# Altium PCB EMG_MainBoard_Layout.PcbDoc (part 3 of 6)
Units mm, origin at the board's own origin, x right, y up, seen from the top; angles counter-clockwise.
Board outline 80 x 45 mm, 4 copper layers (L1 TOP, L2 GND, L3 POWER SIGNAL, L4 BOTTOM GND), stack 1.164 mm thick; 231 components, 136 nets, 808 pads, 288 vias.
Unrouted connection lines stored in the file: 570.
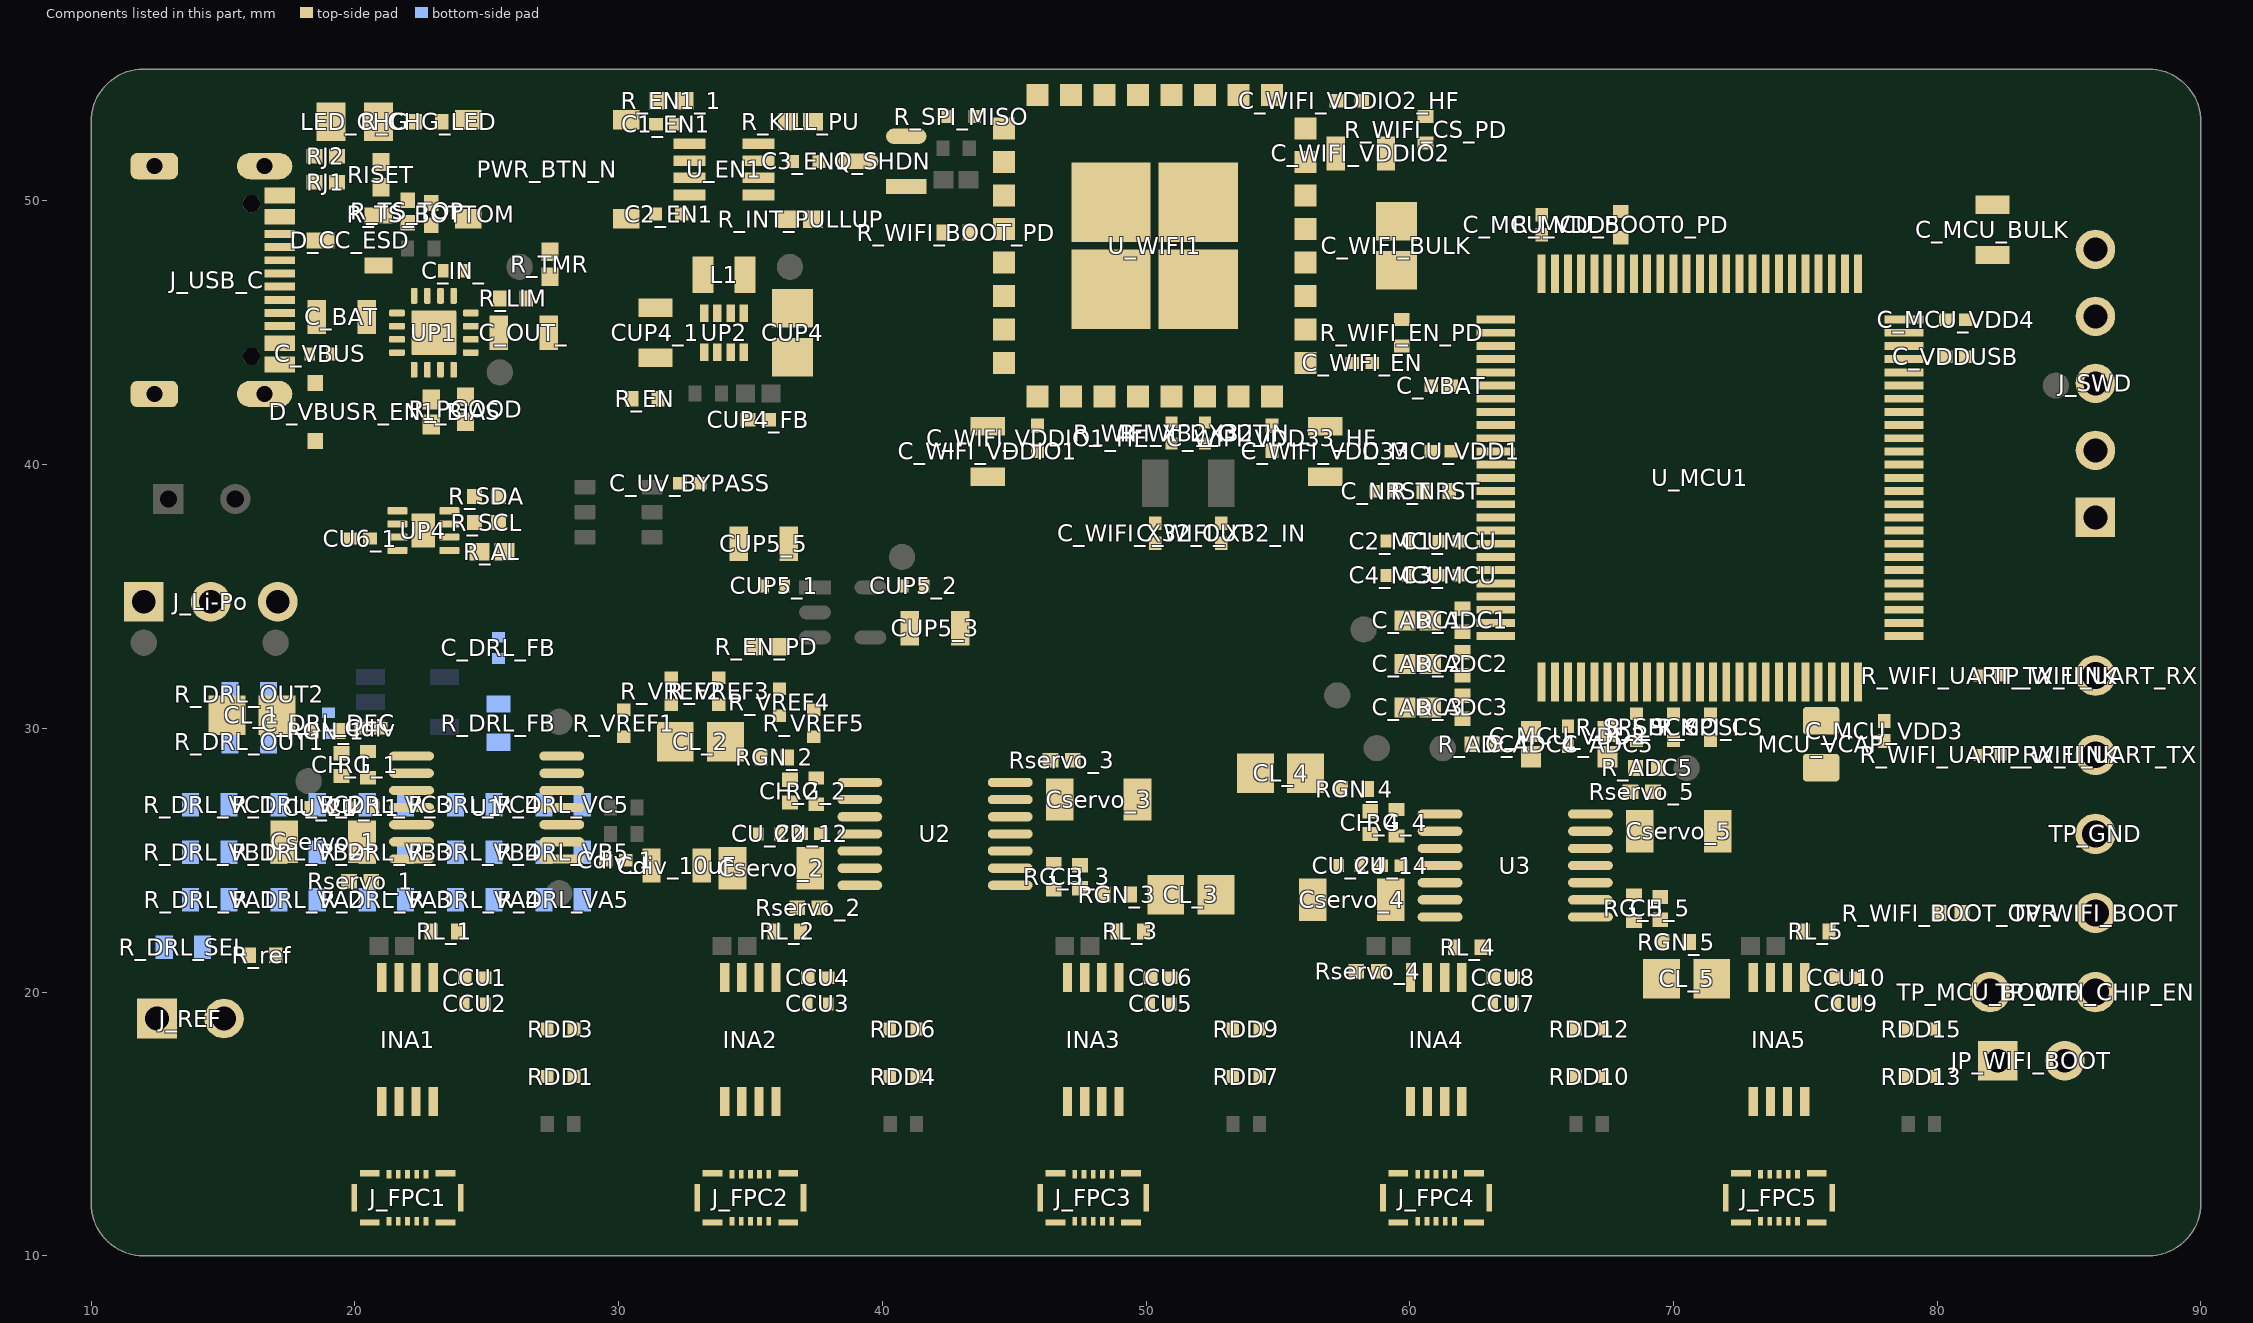
[diagram p4: the components of this part, seen from the top]

## Part data (continued)
CUP5_1: library part EMG_R5_CUP5_1, "Murata GRM155C71C105KE11D: 1 uF 16 V X7S +/-10%, 0402/1005 metric", Capacitance="1 uF", Dielectric=X7S, Manufacturer=Murata, Package="0402 / 1005 metric", Tolerance=+/-10%, Voltage Rating="16 V", Check_prices=https://www.snapeda.com/parts/GRM155C71C105KE11D/Murata/view-part/?ref=eda, Controlled Revision="R5 2026-09-16; project-local frozen symbol/footprint", Manufacturer Part Number=GRM155C71C105KE11D, MF=Murata, MP=GRM155C71C105KE11D, SnapEDA_Link=https://www.snapeda.com/parts/GRM155C71C105KE11D/Murata/view-part/?ref=snap
CUP5_2: library part EMG_R5_CUP5_2, "Murata GRM155C71C105KE11D: 1 uF 16 V X7S +/-10%, 0402/1005 metric", Capacitance="1 uF", Dielectric=X7S, Manufacturer=Murata, Package="0402 / 1005 metric", Tolerance=+/-10%, Voltage Rating="16 V", Check_prices=https://www.snapeda.com/parts/GRM155C71C105KE11D/Murata/view-part/?ref=eda, Controlled Revision="R5 2026-09-16; project-local frozen symbol/footprint", Manufacturer Part Number=GRM155C71C105KE11D, MF=Murata, MP=GRM155C71C105KE11D, SnapEDA_Link=https://www.snapeda.com/parts/GRM155C71C105KE11D/Murata/view-part/?ref=snap
CUP5_3: library part EMG_R5_CUP5_3, "10 µF ±10% 25V Ceramic Capacitor X7S 0805 (2012 Metric)", Controlled Revision="R5 2026-09-16; project-local frozen symbol/footprint"
CUP5_5: library part EMG_R5_CUP5_5, "10 µF ±10% 25V Ceramic Capacitor X7S 0805 (2012 Metric)", Controlled Revision="R5 2026-09-16; project-local frozen symbol/footprint"
D_CC_ESD: library part EMG_R5_D_CC_ESD, "TVS Diode (Uni-directional)", Manufacturer_Name=Nexperia, Controlled Revision="R5 2026-09-16; project-local frozen symbol/footprint", Datasheet Link=https://assets.nexperia.com/documents/data-sheet/PESD5V0X2UT.pdf, Height=1mm, Manufacturer_Part_Number=PESD5V0X2UTR
D_VBUS: library part EMG_R5_D_VBUS, "TVS DIODE 5V 14V SOD323", Controlled Revision="R5 2026-09-16; project-local frozen symbol/footprint"
INA1: library part EMG_R5_INA1, "Micropower, Zero Drift, True Rail-to-Rail Instrumentation Amplifier", Package="MSOP-8 Analog Devices", Availability="In Stock", Check_prices=https://www.snapeda.com/parts/AD8237ARMZ/Analog+Devices/view-part/?ref=eda, Controlled Revision="R5 2026-09-16; project-local frozen symbol/footprint", EMG Library Revision="R3 2026-09-12; EMG_AD8237_R3_MSOP8; numeric pad IDs 1-8", MF="Analog Devices", MP=AD8237ARMZ, Price=None, Purchase-URL=https://pricing.snapeda.com/search?q=AD8237ARMZ&ref=eda, SnapEDA_Link=https://www.snapeda.com/parts/AD8237ARMZ/Analog+Devices/view-part/?ref=snap
INA2: library part EMG_R5_INA2, "Micropower, Zero Drift, True Rail-to-Rail Instrumentation Amplifier", Package="MSOP-8 Analog Devices", Availability="In Stock", Check_prices=https://www.snapeda.com/parts/AD8237ARMZ/Analog+Devices/view-part/?ref=eda, Controlled Revision="R5 2026-09-16; project-local frozen symbol/footprint", EMG Library Revision="R3 2026-09-12; EMG_AD8237_R3_MSOP8; numeric pad IDs 1-8", MF="Analog Devices", MP=AD8237ARMZ, Price=None, Purchase-URL=https://pricing.snapeda.com/search?q=AD8237ARMZ&ref=eda, SnapEDA_Link=https://www.snapeda.com/parts/AD8237ARMZ/Analog+Devices/view-part/?ref=snap
INA3: library part EMG_R5_INA3, "Micropower, Zero Drift, True Rail-to-Rail Instrumentation Amplifier", Package="MSOP-8 Analog Devices", Availability="In Stock", Check_prices=https://www.snapeda.com/parts/AD8237ARMZ/Analog+Devices/view-part/?ref=eda, Controlled Revision="R5 2026-09-16; project-local frozen symbol/footprint", EMG Library Revision="R3 2026-09-12; EMG_AD8237_R3_MSOP8; numeric pad IDs 1-8", MF="Analog Devices", MP=AD8237ARMZ, Price=None, Purchase-URL=https://pricing.snapeda.com/search?q=AD8237ARMZ&ref=eda, SnapEDA_Link=https://www.snapeda.com/parts/AD8237ARMZ/Analog+Devices/view-part/?ref=snap
INA4: library part EMG_R5_INA4, "Micropower, Zero Drift, True Rail-to-Rail Instrumentation Amplifier", Package="MSOP-8 Analog Devices", Availability="In Stock", Check_prices=https://www.snapeda.com/parts/AD8237ARMZ/Analog+Devices/view-part/?ref=eda, Controlled Revision="R5 2026-09-16; project-local frozen symbol/footprint", EMG Library Revision="R3 2026-09-12; EMG_AD8237_R3_MSOP8; numeric pad IDs 1-8", MF="Analog Devices", MP=AD8237ARMZ, Price=None, Purchase-URL=https://pricing.snapeda.com/search?q=AD8237ARMZ&ref=eda, SnapEDA_Link=https://www.snapeda.com/parts/AD8237ARMZ/Analog+Devices/view-part/?ref=snap
INA5: library part EMG_R5_INA5, "Micropower, Zero Drift, True Rail-to-Rail Instrumentation Amplifier", Package="MSOP-8 Analog Devices", Availability="In Stock", Check_prices=https://www.snapeda.com/parts/AD8237ARMZ/Analog+Devices/view-part/?ref=eda, Controlled Revision="R5 2026-09-16; project-local frozen symbol/footprint", EMG Library Revision="R3 2026-09-12; EMG_AD8237_R3_MSOP8; numeric pad IDs 1-8", MF="Analog Devices", MP=AD8237ARMZ, Price=None, Purchase-URL=https://pricing.snapeda.com/search?q=AD8237ARMZ&ref=eda, SnapEDA_Link=https://www.snapeda.com/parts/AD8237ARMZ/Analog+Devices/view-part/?ref=snap
J_FPC1: library part EMG_R5_J_FPC1, "10 Position Connector Receptacle, Center Strip Contacts Surface Mount Gold", Package=None, Check_prices=https://www.snapeda.com/parts/BK13C06-10DS/2-0.35V(895)/Hirose+Electric+Co+Ltd/view-part/?ref=eda, Controlled Revision="R5 2026-09-16; project-local frozen symbol/footprint", MF="Hirose Electric Co Ltd", MP=BK13C06-10DS/2-0.35V(895), SnapEDA_Link=https://www.snapeda.com/parts/BK13C06-10DS/2-0.35V(895)/Hirose+Electric+Co+Ltd/view-part/?ref=snap
J_FPC2: library part EMG_R5_J_FPC2, "10 Position Connector Receptacle, Center Strip Contacts Surface Mount Gold", Package=None, Check_prices=https://www.snapeda.com/parts/BK13C06-10DS/2-0.35V(895)/Hirose+Electric+Co+Ltd/view-part/?ref=eda, Controlled Revision="R5 2026-09-16; project-local frozen symbol/footprint", MF="Hirose Electric Co Ltd", MP=BK13C06-10DS/2-0.35V(895), SnapEDA_Link=https://www.snapeda.com/parts/BK13C06-10DS/2-0.35V(895)/Hirose+Electric+Co+Ltd/view-part/?ref=snap
J_FPC3: library part EMG_R5_J_FPC3, "10 Position Connector Receptacle, Center Strip Contacts Surface Mount Gold", Package=None, Check_prices=https://www.snapeda.com/parts/BK13C06-10DS/2-0.35V(895)/Hirose+Electric+Co+Ltd/view-part/?ref=eda, Controlled Revision="R5 2026-09-16; project-local frozen symbol/footprint", MF="Hirose Electric Co Ltd", MP=BK13C06-10DS/2-0.35V(895), SnapEDA_Link=https://www.snapeda.com/parts/BK13C06-10DS/2-0.35V(895)/Hirose+Electric+Co+Ltd/view-part/?ref=snap
J_FPC4: library part EMG_R5_J_FPC4, "10 Position Connector Receptacle, Center Strip Contacts Surface Mount Gold", Package=None, Check_prices=https://www.snapeda.com/parts/BK13C06-10DS/2-0.35V(895)/Hirose+Electric+Co+Ltd/view-part/?ref=eda, Controlled Revision="R5 2026-09-16; project-local frozen symbol/footprint", MF="Hirose Electric Co Ltd", MP=BK13C06-10DS/2-0.35V(895), SnapEDA_Link=https://www.snapeda.com/parts/BK13C06-10DS/2-0.35V(895)/Hirose+Electric+Co+Ltd/view-part/?ref=snap
J_FPC5: library part EMG_R5_J_FPC5, "10 Position Connector Receptacle, Center Strip Contacts Surface Mount Gold", Package=None, Check_prices=https://www.snapeda.com/parts/BK13C06-10DS/2-0.35V(895)/Hirose+Electric+Co+Ltd/view-part/?ref=eda, Controlled Revision="R5 2026-09-16; project-local frozen symbol/footprint", MF="Hirose Electric Co Ltd", MP=BK13C06-10DS/2-0.35V(895), SnapEDA_Link=https://www.snapeda.com/parts/BK13C06-10DS/2-0.35V(895)/Hirose+Electric+Co+Ltd/view-part/?ref=snap
J_Li-Po: library part EMG_R5_J_Li-Po, "Header, 3-Pin", Controlled Revision="R5 2026-09-16; project-local frozen symbol/footprint", LatestRevisionDate=17-Jul-2002, LatestRevisionNote="Re-released for DXP Platform.", Production Release Blocker="Freeze exact orderable manufacturer/MPN, package/mating/contact definition before production; do not infer from generic symbol.", Publisher="Altium Limited"
J_REF: library part EMG_R5_J_REF, "Header, 2-Pin", Controlled Revision="R5 2026-09-16; project-local frozen symbol/footprint", LatestRevisionDate=17-Jul-2002, LatestRevisionNote="Re-released for DXP Platform.", Production Release Blocker="Freeze exact orderable manufacturer/MPN, package/mating/contact definition before production; do not infer from generic symbol.", Publisher="Altium Limited"
J_SWD: library part EMG_R5_J_SWD, "Header, 5-Pin, Right Angle", Controlled Revision="R5 2026-09-16; project-local frozen symbol/footprint", LatestRevisionDate=17-Jul-2002, LatestRevisionNote="Re-released for DXP Platform.", Production Release Blocker="Freeze exact orderable manufacturer/MPN, package/mating/contact definition before production; do not infer from generic symbol.", Publisher="Altium Limited"
J_USB_C: library part EMG_R5_J_USB_C, "USB-C (USB TYPE-C) USB 2.0 Receptacle Connector 24 (16+8 Dummy) Position Surface Mount, Right Angle; Through Hole", Package=None, Check_prices=https://www.snapeda.com/parts/USB4105GFA060/Global+Connector+Technology/view-part/?ref=eda, Controlled Revision="R5 2026-09-16; project-local frozen symbol/footprint", MF="Global Connector Technology", MP=USB4105GFA060, SnapEDA_Link=https://www.snapeda.com/parts/USB4105GFA060/Global+Connector+Technology/view-part/?ref=snap
JP_WIFI_BOOT: library part EMG_R5_JP_WIFI_BOOT, "Header, 2-Pin, Right Angle", Controlled Revision="R5 2026-09-16; project-local frozen symbol/footprint", LatestRevisionDate=17-Jul-2002, LatestRevisionNote="Re-released for DXP Platform.", Production Release Blocker="Freeze exact orderable manufacturer/MPN, package/mating/contact definition before production; do not infer from generic symbol.", Publisher="Altium Limited"
L1: library part EMG_R5_L1, "FIXED IND 1.0UH 3300MA NONAUTO", Controlled Revision="R5 2026-09-16; project-local frozen symbol/footprint"
LED_CHG: library part EMG_R5_LED_CHG, "Red - LED Indication - Discrete 1.8V 0805 (2012 Metric)", Package="0805 Lumex", Check_prices=https://www.snapeda.com/parts/SML-LXT0805SRW-TR/Lumex/view-part/?ref=eda, Controlled Revision="R5 2026-09-16; project-local frozen symbol/footprint", MF="Lumex Opto/Components", MP=SML-LXT0805SRW-TR, SnapEDA_Link=https://www.snapeda.com/parts/SML-LXT0805SRW-TR/Lumex/view-part/?ref=snap
MCU_VCAP: library part EMG_R5_MCU_VCAP, "4.7 ÂµF Â±10% 16V Ceramic Capacitor X5R 0805 (2012 Metric)", Package="SMD-2 Samsung", Check_prices=https://www.snapeda.com/parts/CL21A475KOFNNNE/Samsung/view-part/?ref=eda, Controlled Revision="R5 2026-09-16; project-local frozen symbol/footprint", MF=Samsung, MP=CL21A475KOFNNNE, SnapEDA_Link=https://www.snapeda.com/parts/CL21A475KOFNNNE/Samsung/view-part/?ref=snap
PWR_BTN_N: library part EMG_R5_PWR_BTN_N, "SPST 50mA @ 12VDC Top Actuated Round Button 160gf SMD Tactile Switches RoHS", Package=None, Availability=Unavailable, Controlled Revision="R5 2026-09-16; project-local frozen symbol/footprint", MP=TS-1187A-B-A-B, Price=None, Production Release Blocker="Freeze exact orderable manufacturer/MPN, package/mating/contact definition before production; do not infer from generic symbol."
Q_SHDN: library part EMG_R5_Q_SHDN, "MOSFET N-CH 50V 220MA SOT-23", Case/Package=SOT-23, Continuous Drain Current (ID)=220mA, Drain to Source Breakdown Voltage=50V, Drain to Source Resistance=3.5R, Gate to Source Voltage (Vgs)=20V, Input Capacitance=27pF, Max Operating Temperature=150°C, Max Power Dissipation=360mW, Min Operating Temperature=-55°C, On-State Resistance=6R, Package Quantity=1, Threshold Voltage=1.3V, Contact Plating=Tin, Controlled Revision="R5 2026-09-16; project-local frozen symbol/footprint", Current Rating=220mA, Drain to Source Voltage (Vdss)=50V, Dual Supply Voltage=50V, Element Configuration=Single, Fall Time=9ns, Height=0.93mm, Lead Free="Lead Free", Length=2.92mm, Mount="Surface Mount", Nominal Vgs=1.3V, Number of Elements=1, Number of Pins=3, Packaging="Tape and Reel", Power Dissipation=360mW, Production Release Blocker="Freeze exact orderable manufacturer/MPN, package/mating/contact definition before production; do not infer from generic symbol.", Radiation Hardening=No, Rds On Max=3.5R, REACH SVHC="No SVHC", Rise Time=9ns, Termination=SMD/SMT, Turn-Off Delay Time=20ns, Turn-On Delay Time=2.5ns, Voltage Rating (DC)=50V, Weight=0.03g, Width=1.3mm
R_ADC1: library part EMG_R5_R_ADC1, "330 Ohm 1/16W Thick Film Resistor 0402 Chip - Surface Mount", Package="0402-2 ROYAL", Check_prices=https://www.snapeda.com/parts/0402WGF3300TCE/Uni-Royal/view-part/?ref=eda, Controlled Revision="R5 2026-09-16; project-local frozen symbol/footprint", MF=Uni-Royal, MP=0402WGF3300TCE, SnapEDA_Link=https://www.snapeda.com/parts/0402WGF3300TCE/Uni-Royal/view-part/?ref=snap
R_ADC2: library part EMG_R5_R_ADC2, "330 Ohm 1/16W Thick Film Resistor 0402 Chip - Surface Mount", Package="0402-2 ROYAL", Check_prices=https://www.snapeda.com/parts/0402WGF3300TCE/Uni-Royal/view-part/?ref=eda, Controlled Revision="R5 2026-09-16; project-local frozen symbol/footprint", MF=Uni-Royal, MP=0402WGF3300TCE, SnapEDA_Link=https://www.snapeda.com/parts/0402WGF3300TCE/Uni-Royal/view-part/?ref=snap
R_ADC3: library part EMG_R5_R_ADC3, "330 Ohm 1/16W Thick Film Resistor 0402 Chip - Surface Mount", Package="0402-2 ROYAL", Check_prices=https://www.snapeda.com/parts/0402WGF3300TCE/Uni-Royal/view-part/?ref=eda, Controlled Revision="R5 2026-09-16; project-local frozen symbol/footprint", MF=Uni-Royal, MP=0402WGF3300TCE, SnapEDA_Link=https://www.snapeda.com/parts/0402WGF3300TCE/Uni-Royal/view-part/?ref=snap
R_ADC4: library part EMG_R5_R_ADC4, "330 Ohm 1/16W Thick Film Resistor 0402 Chip - Surface Mount", Package="0402-2 ROYAL", Check_prices=https://www.snapeda.com/parts/0402WGF3300TCE/Uni-Royal/view-part/?ref=eda, Controlled Revision="R5 2026-09-16; project-local frozen symbol/footprint", MF=Uni-Royal, MP=0402WGF3300TCE, SnapEDA_Link=https://www.snapeda.com/parts/0402WGF3300TCE/Uni-Royal/view-part/?ref=snap
R_ADC5: library part EMG_R5_R_ADC5, "330 Ohm 1/16W Thick Film Resistor 0402 Chip - Surface Mount", Package="0402-2 ROYAL", Check_prices=https://www.snapeda.com/parts/0402WGF3300TCE/Uni-Royal/view-part/?ref=eda, Controlled Revision="R5 2026-09-16; project-local frozen symbol/footprint", MF=Uni-Royal, MP=0402WGF3300TCE, SnapEDA_Link=https://www.snapeda.com/parts/0402WGF3300TCE/Uni-Royal/view-part/?ref=snap
R_AL: library part EMG_R5_R_AL, "Thin Film Chip Resistors Automotive Grade 10kΩ 0.5% 25ppm/°C 0402", Case Code (Imperial)=0402, Case Code (Metric)=1005, Max Operating Temperature=155°C, Max Power Dissipation=63mW, Min Operating Temperature=-55°C, Ratings=AEC-Q200, Resistance=10kR, Resistor Type="Thin Film", Temperature Coefficient=25ppm/°C, Tolerance=0.5%, Case/Package=0402, Controlled Revision="R5 2026-09-16; project-local frozen symbol/footprint", Features="Moisture Resistant", Height=0.014inch, Length=0.039inch, Number of Terminations=2, Packaging="Cut Tape", RoHS Compliant=Yes, Series=AT, Width=0.02inch
R_CHG_LED: library part EMG_R5_R_CHG_LED, "RES 1.5kΩ ±1% 0.063W 0402", Case Code (Imperial)=0402, Case Code (Metric)=1005, Max Operating Temperature=155°C, Max Power Dissipation=63mW, Min Operating Temperature=-55°C, Power Rating=62.5mW, Resistance=1.5kR, Resistor Type="Thick Film", Temperature Coefficient=100ppm/°C, Tolerance=1%, Voltage Rating=50V, Case/Package=0402, Controlled Revision="R5 2026-09-16; project-local frozen symbol/footprint", Features="Moisture Resistant", Height=0.015inch, Lead Free="Lead Free", Length=0.039inch, Mount="Surface Mount", Number of Terminations=2, Packaging="Tape and Reel", RoHS Compliant=Yes, Series=AC, Size Code=0402, Termination=SMD/SMT, Width=0.5mm
R_DRL_FB: library part EMG_DRL_R_DRL_FB, "Optional DRL provision; not fitted in PROTO_1_REMOTE_NTC", Manufacturer=YAGEO, Manufacturer Part Number=RC0603FR-071M5L, Package="0603 / 1608 metric", Power Rating="0.1W at70C (resistors)", Tolerance=1%, Voltage Rating="75V limiting element voltage (non-jumper)", Assembly Variant="PROTO_1_REMOTE_NTC: Not Fitted", Population="DNP - optional DRL", Qualification="DNP prototype provision; populated loop and body-interface qualification required"
R_DRL_OUT1: library part EMG_DRL_R_DRL_OUT1, "Optional DRL provision; not fitted in PROTO_1_REMOTE_NTC", Manufacturer="Panasonic Industry", Manufacturer Part Number=ERJ3EKF4703V, Package="0603 / 1608 metric", Power Rating="0.1W at70C (resistors)", Tolerance=1%, Voltage Rating="75V limiting element voltage (non-jumper)", Assembly Variant="PROTO_1_REMOTE_NTC: Not Fitted", Population="DNP - optional DRL", Qualification="DNP prototype provision; populated loop and body-interface qualification required"
R_DRL_OUT2: library part EMG_DRL_R_DRL_OUT2, "Optional DRL provision; not fitted in PROTO_1_REMOTE_NTC", Manufacturer="Panasonic Industry", Manufacturer Part Number=ERJ3EKF4703V, Package="0603 / 1608 metric", Power Rating="0.1W at70C (resistors)", Tolerance=1%, Voltage Rating="75V limiting element voltage (non-jumper)", Assembly Variant="PROTO_1_REMOTE_NTC: Not Fitted", Population="DNP - optional DRL", Qualification="DNP prototype provision; populated loop and body-interface qualification required"
R_DRL_SEL: library part EMG_DRL_R_DRL_SEL, "Optional DRL provision; not fitted in PROTO_1_REMOTE_NTC", Manufacturer="Panasonic Industry", Manufacturer Part Number=ERJ3GEY0R00V, Package="0603 / 1608 metric", Power Rating="0.1W at70C (resistors)", Tolerance="Jumper: 50mOhm maximum", Voltage Rating="75V limiting element voltage (non-jumper)", Assembly Variant="PROTO_1_REMOTE_NTC: Not Fitted", Population="DNP - optional DRL", Qualification="DNP prototype provision; populated loop and body-interface qualification required"
R_DRL_VA1: library part EMG_DRL_R_DRL_VA1, "Optional DRL provision; not fitted in PROTO_1_REMOTE_NTC", Manufacturer="Panasonic Industry", Manufacturer Part Number=ERJ3EKF1004V, Package="0603 / 1608 metric", Power Rating="0.1W at70C (resistors)", Tolerance=1%, Voltage Rating="75V limiting element voltage (non-jumper)", Assembly Variant="PROTO_1_REMOTE_NTC: Not Fitted", Population="DNP - optional DRL", Qualification="DNP prototype provision; populated loop and body-interface qualification required"
R_DRL_VA2: library part EMG_DRL_R_DRL_VA2, "Optional DRL provision; not fitted in PROTO_1_REMOTE_NTC", Manufacturer="Panasonic Industry", Manufacturer Part Number=ERJ3EKF1004V, Package="0603 / 1608 metric", Power Rating="0.1W at70C (resistors)", Tolerance=1%, Voltage Rating="75V limiting element voltage (non-jumper)", Assembly Variant="PROTO_1_REMOTE_NTC: Not Fitted", Population="DNP - optional DRL", Qualification="DNP prototype provision; populated loop and body-interface qualification required"
R_DRL_VA3: library part EMG_DRL_R_DRL_VA3, "Optional DRL provision; not fitted in PROTO_1_REMOTE_NTC", Manufacturer="Panasonic Industry", Manufacturer Part Number=ERJ3EKF1004V, Package="0603 / 1608 metric", Power Rating="0.1W at70C (resistors)", Tolerance=1%, Voltage Rating="75V limiting element voltage (non-jumper)", Assembly Variant="PROTO_1_REMOTE_NTC: Not Fitted", Population="DNP - optional DRL", Qualification="DNP prototype provision; populated loop and body-interface qualification required"
R_DRL_VA4: library part EMG_DRL_R_DRL_VA4, "Optional DRL provision; not fitted in PROTO_1_REMOTE_NTC", Manufacturer="Panasonic Industry", Manufacturer Part Number=ERJ3EKF1004V, Package="0603 / 1608 metric", Power Rating="0.1W at70C (resistors)", Tolerance=1%, Voltage Rating="75V limiting element voltage (non-jumper)", Assembly Variant="PROTO_1_REMOTE_NTC: Not Fitted", Population="DNP - optional DRL", Qualification="DNP prototype provision; populated loop and body-interface qualification required"
R_DRL_VA5: library part EMG_DRL_R_DRL_VA5, "Optional DRL provision; not fitted in PROTO_1_REMOTE_NTC", Manufacturer="Panasonic Industry", Manufacturer Part Number=ERJ3EKF1004V, Package="0603 / 1608 metric", Power Rating="0.1W at70C (resistors)", Tolerance=1%, Voltage Rating="75V limiting element voltage (non-jumper)", Assembly Variant="PROTO_1_REMOTE_NTC: Not Fitted", Population="DNP - optional DRL", Qualification="DNP prototype provision; populated loop and body-interface qualification required"
R_DRL_VB1: library part EMG_DRL_R_DRL_VB1, "Optional DRL provision; not fitted in PROTO_1_REMOTE_NTC", Manufacturer="Panasonic Industry", Manufacturer Part Number=ERJ3EKF1004V, Package="0603 / 1608 metric", Power Rating="0.1W at70C (resistors)", Tolerance=1%, Voltage Rating="75V limiting element voltage (non-jumper)", Assembly Variant="PROTO_1_REMOTE_NTC: Not Fitted", Population="DNP - optional DRL", Qualification="DNP prototype provision; populated loop and body-interface qualification required"
R_DRL_VB2: library part EMG_DRL_R_DRL_VB2, "Optional DRL provision; not fitted in PROTO_1_REMOTE_NTC", Manufacturer="Panasonic Industry", Manufacturer Part Number=ERJ3EKF1004V, Package="0603 / 1608 metric", Power Rating="0.1W at70C (resistors)", Tolerance=1%, Voltage Rating="75V limiting element voltage (non-jumper)", Assembly Variant="PROTO_1_REMOTE_NTC: Not Fitted", Population="DNP - optional DRL", Qualification="DNP prototype provision; populated loop and body-interface qualification required"
R_DRL_VB3: library part EMG_DRL_R_DRL_VB3, "Optional DRL provision; not fitted in PROTO_1_REMOTE_NTC", Manufacturer="Panasonic Industry", Manufacturer Part Number=ERJ3EKF1004V, Package="0603 / 1608 metric", Power Rating="0.1W at70C (resistors)", Tolerance=1%, Voltage Rating="75V limiting element voltage (non-jumper)", Assembly Variant="PROTO_1_REMOTE_NTC: Not Fitted", Population="DNP - optional DRL", Qualification="DNP prototype provision; populated loop and body-interface qualification required"
R_DRL_VB4: library part EMG_DRL_R_DRL_VB4, "Optional DRL provision; not fitted in PROTO_1_REMOTE_NTC", Manufacturer="Panasonic Industry", Manufacturer Part Number=ERJ3EKF1004V, Package="0603 / 1608 metric", Power Rating="0.1W at70C (resistors)", Tolerance=1%, Voltage Rating="75V limiting element voltage (non-jumper)", Assembly Variant="PROTO_1_REMOTE_NTC: Not Fitted", Population="DNP - optional DRL", Qualification="DNP prototype provision; populated loop and body-interface qualification required"
R_DRL_VB5: library part EMG_DRL_R_DRL_VB5, "Optional DRL provision; not fitted in PROTO_1_REMOTE_NTC", Manufacturer="Panasonic Industry", Manufacturer Part Number=ERJ3EKF1004V, Package="0603 / 1608 metric", Power Rating="0.1W at70C (resistors)", Tolerance=1%, Voltage Rating="75V limiting element voltage (non-jumper)", Assembly Variant="PROTO_1_REMOTE_NTC: Not Fitted", Population="DNP - optional DRL", Qualification="DNP prototype provision; populated loop and body-interface qualification required"
R_DRL_VC1: library part EMG_DRL_R_DRL_VC1, "Optional DRL provision; not fitted in PROTO_1_REMOTE_NTC", Manufacturer="Panasonic Industry", Manufacturer Part Number=ERJ3EKF1004V, Package="0603 / 1608 metric", Power Rating="0.1W at70C (resistors)", Tolerance=1%, Voltage Rating="75V limiting element voltage (non-jumper)", Assembly Variant="PROTO_1_REMOTE_NTC: Not Fitted", Population="DNP - optional DRL", Qualification="DNP prototype provision; populated loop and body-interface qualification required"
R_DRL_VC2: library part EMG_DRL_R_DRL_VC2, "Optional DRL provision; not fitted in PROTO_1_REMOTE_NTC", Manufacturer="Panasonic Industry", Manufacturer Part Number=ERJ3EKF1004V, Package="0603 / 1608 metric", Power Rating="0.1W at70C (resistors)", Tolerance=1%, Voltage Rating="75V limiting element voltage (non-jumper)", Assembly Variant="PROTO_1_REMOTE_NTC: Not Fitted", Population="DNP - optional DRL", Qualification="DNP prototype provision; populated loop and body-interface qualification required"
R_DRL_VC3: library part EMG_DRL_R_DRL_VC3, "Optional DRL provision; not fitted in PROTO_1_REMOTE_NTC", Manufacturer="Panasonic Industry", Manufacturer Part Number=ERJ3EKF1004V, Package="0603 / 1608 metric", Power Rating="0.1W at70C (resistors)", Tolerance=1%, Voltage Rating="75V limiting element voltage (non-jumper)", Assembly Variant="PROTO_1_REMOTE_NTC: Not Fitted", Population="DNP - optional DRL", Qualification="DNP prototype provision; populated loop and body-interface qualification required"
R_DRL_VC4: library part EMG_DRL_R_DRL_VC4, "Optional DRL provision; not fitted in PROTO_1_REMOTE_NTC", Manufacturer="Panasonic Industry", Manufacturer Part Number=ERJ3EKF1004V, Package="0603 / 1608 metric", Power Rating="0.1W at70C (resistors)", Tolerance=1%, Voltage Rating="75V limiting element voltage (non-jumper)", Assembly Variant="PROTO_1_REMOTE_NTC: Not Fitted", Population="DNP - optional DRL", Qualification="DNP prototype provision; populated loop and body-interface qualification required"
R_DRL_VC5: library part EMG_DRL_R_DRL_VC5, "Optional DRL provision; not fitted in PROTO_1_REMOTE_NTC", Manufacturer="Panasonic Industry", Manufacturer Part Number=ERJ3EKF1004V, Package="0603 / 1608 metric", Power Rating="0.1W at70C (resistors)", Tolerance=1%, Voltage Rating="75V limiting element voltage (non-jumper)", Assembly Variant="PROTO_1_REMOTE_NTC: Not Fitted", Population="DNP - optional DRL", Qualification="DNP prototype provision; populated loop and body-interface qualification required"
R_EN: library part EMG_R5_R_EN, "AC0402 100KΩ 0.0625W 1.00%", Manufacturer=Yageo, Package=AC0402, Power Rating=0.0625W, Resistance=100KΩ, Temperature="-55°C to +155°C", Temperature Range High=+155°C, Temperature Range Low=-55°C, Tolerance=0.01, Voltage Rating=50V, Automotive=Yes, Automotive Grade="Grade 0", Category=Res, ComponentLink2Description=Datasheet, ComponentLink2URL=http://www.yageo.com/documents/recent/PYu-AC_51_RoHS_L_6.pdf, Composition="Thick Film", Controlled Revision="R5 2026-09-16; project-local frozen symbol/footprint", Device Class L1="Passive Components", Device Class L2=Resistors, Device Class L3="Chip SMD Resistors", Footprint Url=http://www.yageo.com/exep/pages/download/literatures/PYu-R_Mount_10.pdf, Height=0.37mm, Ipc Land Pattern Name=RESC10050X32, Lead Free=Yes, Manufacturer Part Number=AC0402FR-7D100KL, Octopart=https://octopart.com/ac0402fr-7d100kl-yageo-91024821, RoHS=TRUE, Series=AC
R_EN1_1: library part EMG_R5_R_EN1_1, "RES 1K OHM 1% 1/16W 0402", Case Code (Imperial)=0402, Case Code (Metric)=1005, Max Operating Temperature=155°C, Max Power Dissipation=63mW, Min Operating Temperature=-55°C, Power Rating=62.5mW, Resistance=1kR, Resistance Tolerance=1%, Resistor Type="Thick Film", Temperature Coefficient=100ppm/°C, Voltage Rating=50V, Case/Package=0402, Construction=Rectangular, Controlled Revision="R5 2026-09-16; project-local frozen symbol/footprint", Depth=0.5mm, Features="Moisture Resistant", Height=0.32mm, Lead Free="Lead Free", Length=1mm, Military Standard=Not, Number of Pins=2, Number of Terminations=2, Packaging="Tape and Reel", Reach SVHC Compliant=Yes, RoHS Compliant=Yes, Series=RC, Size Code=0402, Technology="THICK FILM", Termination=SMD/SMT, Tolerance=1%, Voltage Rating (DC)=50V, Width=0.5mm
R_EN1_BIAS: library part EMG_R5_R_EN1_BIAS, "Thin Film Chip Resistors Automotive Grade 10kΩ 0.5% 25ppm/°C 0402", Case Code (Imperial)=0402, Case Code (Metric)=1005, Max Operating Temperature=155°C, Max Power Dissipation=63mW, Min Operating Temperature=-55°C, Ratings=AEC-Q200, Resistance=10kR, Resistor Type="Thin Film", Temperature Coefficient=25ppm/°C, Tolerance=0.5%, Case/Package=0402, Controlled Revision="R5 2026-09-16; project-local frozen symbol/footprint", Features="Moisture Resistant", Height=0.014inch, Length=0.039inch, Number of Terminations=2, Packaging="Cut Tape", RoHS Compliant=Yes, Series=AT, Width=0.02inch
R_EN_PD: library part EMG_R5_R_EN_PD, "RES 1MΩ ±1% 0.063W 0402", Case Code (Imperial)=0402, Case Code (Metric)=1005, Max Operating Temperature=155°C, Max Power Dissipation=63mW, Min Operating Temperature=-55°C, Power Rating=62.5mW, Resistance=1MR, Resistor Type="Thick Film", Temperature Coefficient=100ppm/°C, Tolerance=1%, Voltage Rating=50V, Case/Package=0402, Construction=Rectangular, Controlled Revision="R5 2026-09-16; project-local frozen symbol/footprint", Depth=0.5mm, Features="Moisture Resistant", Height=0.015inch, Lead Free="Lead Free", Length=0.039inch, Military Standard=Not, Number of Terminations=2, Packaging="Tape and Reel", RoHS Compliant=Yes, Series=AC, Size Code=0402, Termination=SMD/SMT, Width=0.5mm
R_INT_PULLUP: library part EMG_R5_R_INT_PULLUP, "Thin Film Chip Resistors Automotive Grade 10kΩ 0.5% 25ppm/°C 0402", Case Code (Imperial)=0402, Case Code (Metric)=1005, Max Operating Temperature=155°C, Max Power Dissipation=63mW, Min Operating Temperature=-55°C, Ratings=AEC-Q200, Resistance=10kR, Resistor Type="Thin Film", Temperature Coefficient=25ppm/°C, Tolerance=0.5%, Case/Package=0402, Controlled Revision="R5 2026-09-16; project-local frozen symbol/footprint", Features="Moisture Resistant", Height=0.014inch, Length=0.039inch, Number of Terminations=2, Packaging="Cut Tape", RoHS Compliant=Yes, Series=AT, Width=0.02inch
R_KILL_PU: library part EMG_R5_R_KILL_PU, "Thin Film Chip Resistors Automotive Grade 10kΩ 0.5% 25ppm/°C 0402", Case Code (Imperial)=0402, Case Code (Metric)=1005, Max Operating Temperature=155°C, Max Power Dissipation=63mW, Min Operating Temperature=-55°C, Ratings=AEC-Q200, Resistance=10kR, Resistor Type="Thin Film", Temperature Coefficient=25ppm/°C, Tolerance=0.5%, Case/Package=0402, Controlled Revision="R5 2026-09-16; project-local frozen symbol/footprint", Features="Moisture Resistant", Height=0.014inch, Length=0.039inch, Number of Terminations=2, Packaging="Cut Tape", RoHS Compliant=Yes, Series=AT, Width=0.02inch
R_LIM: library part EMG_R5_R_LIM, "RES 3.48kΩ ±1% 0.063W 0402", Case Code (Imperial)=0402, Case Code (Metric)=1005, Max Operating Temperature=155°C, Max Power Dissipation=63mW, Min Operating Temperature=-55°C, Ratings=AEC-Q200, Resistance=3.48kR, Resistor Type="Thick Film", Temperature Coefficient=100ppm/°C, Tolerance=1%, Case/Package=0402, Controlled Revision="R5 2026-09-16; project-local frozen symbol/footprint", Features="Moisture Resistant", Height=0.015inch, Length=0.039inch, Number of Terminations=2, Packaging="Tape and Reel", RoHS Compliant=Yes, Series=AC, Width=0.02inch
R_MCU_BOOT0_PD: library part EMG_R5_R_MCU_BOOT0_PD, "RES 10.0K OHM 1/16W .1% SMD 0402", Manufacturer=Yageo, Package=RT0402, Power Rating=0.063W, Resistance=10KΩ, Temperature="-55°C to +155°C", Temperature Coefficient="25 ppm/°C", Temperature Range High=+155°C, Temperature Range Low=-55°C, Tolerance=0.001, Voltage Rating=50V, Automotive=No, Category=Res, ComponentLink2Description=Datasheet, ComponentLink2URL=http://www.yageo.com/documents/recent/PYu-RT_1-to-0.01_RoHS_L_9.pdf, Composition="Thin Film", Controlled Revision="R5 2026-09-16; project-local frozen symbol/footprint", Device Class L1="Passive Components", Device Class L2=Resistors, Device Class L3="Chip SMD Resistors", Digikey Description="RES 10.0K OHM 1/16W .1% SMD 0402", Footprint Url=http://www.yageo.com/exep/pages/download/literatures/PYu-R_Mount_10.pdf, Height=0.35mm, Ipc Land Pattern Name=RESC10050X30, Lead Free=Yes, Manufacturer Part Number=RT0402BRD0710KL, Mouser Description="Thin Film Resistors - SMD 10K ohm 0.1% 1/16W", Octopart=https://octopart.com/rt0402brd0710kl-yageo-1181432, RoHS=TRUE, Series=RT
R_NRST: library part EMG_R5_R_NRST, "RES 10.0K OHM 1/16W .1% SMD 0402", Manufacturer=Yageo, Package=RT0402, Power Rating=0.063W, Resistance=10KΩ, Temperature="-55°C to +155°C", Temperature Coefficient="25 ppm/°C", Temperature Range High=+155°C, Temperature Range Low=-55°C, Tolerance=0.001, Voltage Rating=50V, Automotive=No, Category=Res, ComponentLink2Description=Datasheet, ComponentLink2URL=http://www.yageo.com/documents/recent/PYu-RT_1-to-0.01_RoHS_L_9.pdf, Composition="Thin Film", Controlled Revision="R5 2026-09-16; project-local frozen symbol/footprint", Device Class L1="Passive Components", Device Class L2=Resistors, Device Class L3="Chip SMD Resistors", Digikey Description="RES 10.0K OHM 1/16W .1% SMD 0402", Footprint Url=http://www.yageo.com/exep/pages/download/literatures/PYu-R_Mount_10.pdf, Height=0.35mm, Ipc Land Pattern Name=RESC10050X30, Lead Free=Yes, Manufacturer Part Number=RT0402BRD0710KL, Mouser Description="Thin Film Resistors - SMD 10K ohm 0.1% 1/16W", Octopart=https://octopart.com/rt0402brd0710kl-yageo-1181432, RoHS=TRUE, Series=RT
R_PGOOD: library part EMG_R5_R_PGOOD, Manufacturer="Yageo / Phycomp", Controlled Revision="R5 2026-09-16; project-local frozen symbol/footprint", Part Number=RC0402FR-0747KL
R_ref: library part EMG_R5_R_ref, "AC0402 100KΩ 0.0625W 1.00%", Manufacturer=Yageo, Package=AC0402, Power Rating=0.0625W, Resistance=100KΩ, Temperature="-55°C to +155°C", Temperature Range High=+155°C, Temperature Range Low=-55°C, Tolerance=0.01, Voltage Rating=50V, Automotive=Yes, Automotive Grade="Grade 0", Category=Res, ComponentLink2Description=Datasheet, ComponentLink2URL=http://www.yageo.com/documents/recent/PYu-AC_51_RoHS_L_6.pdf, Composition="Thick Film", Controlled Revision="R5 2026-09-16; project-local frozen symbol/footprint", Device Class L1="Passive Components", Device Class L2=Resistors, Device Class L3="Chip SMD Resistors", Footprint Url=http://www.yageo.com/exep/pages/download/literatures/PYu-R_Mount_10.pdf, Height=0.37mm, Ipc Land Pattern Name=RESC10050X32, Lead Free=Yes, Manufacturer Part Number=AC0402FR-7D100KL, Octopart=https://octopart.com/ac0402fr-7d100kl-yageo-91024821, RoHS=TRUE, Series=AC
R_SCL: library part EMG_R5_R_SCL, "RES Thick Film, 4.7kΩ, 1%, 0.063W, 100ppm/°C, 0402", Case Code (Imperial)=0402, Case Code (Metric)=1005, Max Operating Temperature=155°C, Max Power Dissipation=63mW, Min Operating Temperature=-55°C, Package Quantity=10, Resistance=4.7kR, Temperature Coefficient=100ppm/°C, Tolerance=1%, Voltage Rating=50V, Case/Package=0402, Composition="Thick Film", Contact Plating=Tin, Controlled Revision="R5 2026-09-16; project-local frozen symbol/footprint", Depth=0.5mm, Features="Automotive AEC-Q200", Height=0.35mm, Lead Free="Lead Free", Length=1mm, Military Standard=Not, Mount="Surface Mount", Number of Terminations=2, Packaging="Tape and Reel", Power Rating=63mW, Radiation Hardening=No, Termination=SMD/SMT, Voltage Rating (DC)=50V, Weight=2.3E-05oz, Width=0.5mm
R_SDA: library part EMG_R5_R_SDA, "RES Thick Film, 4.7kΩ, 1%, 0.063W, 100ppm/°C, 0402", Case Code (Imperial)=0402, Case Code (Metric)=1005, Max Operating Temperature=155°C, Max Power Dissipation=63mW, Min Operating Temperature=-55°C, Package Quantity=10, Resistance=4.7kR, Temperature Coefficient=100ppm/°C, Tolerance=1%, Voltage Rating=50V, Case/Package=0402, Composition="Thick Film", Contact Plating=Tin, Controlled Revision="R5 2026-09-16; project-local frozen symbol/footprint", Depth=0.5mm, Features="Automotive AEC-Q200", Height=0.35mm, Lead Free="Lead Free", Length=1mm, Military Standard=Not, Mount="Surface Mount", Number of Terminations=2, Packaging="Tape and Reel", Power Rating=63mW, Radiation Hardening=No, Termination=SMD/SMT, Voltage Rating (DC)=50V, Weight=2.3E-05oz, Width=0.5mm